# Altium PCB remote.PcbDoc (part 2 of 2)
Units mm, origin at the board's own origin, x right, y up, seen from the top; angles counter-clockwise.
Board outline 60.1 x 131.84 mm, 4 copper layers (Top Layer, Int1 (GND), Int2 (PWR), Bottom Layer), stack 1.569 mm thick; 97 components, 91 nets, 326 pads, 125 vias.
Unrouted connection lines stored in the file: 43.
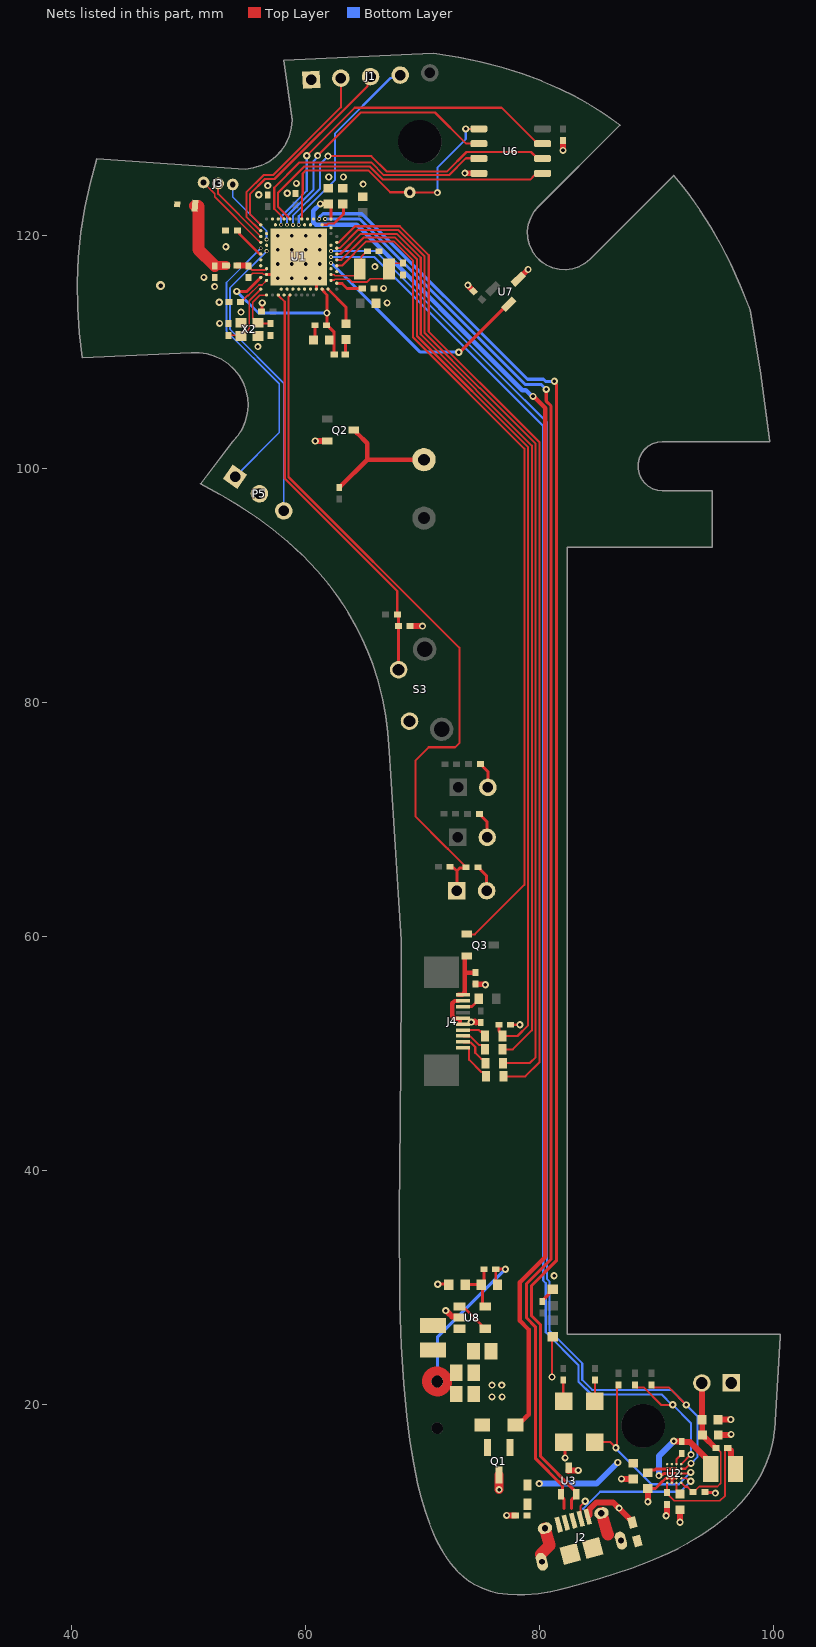
[diagram p4: the nets of this part, all layers, seen from the top]

## Via types
v1: diameter 0.61, hole 0.305, Top Layer to Bottom Layer, 110 vias
v2: diameter 0.33, hole 0.203, Top Layer to Bottom Layer, 13 vias
v3: diameter 0.61, hole 0.305, Top Layer to Bottom Layer, tented both sides, 1 vias
v4: diameter 0.762, hole 0.381, Top Layer to Bottom Layer, 1 vias

## Nets (pads, with @x,y where several pads share a name; then routed paths per layer and width w, separated by ;. In a path a pad name is that pad's centre, name@x,y a point inside that pad or via, vN(x,y) a via of type N, cw(c..) or ccw(c..) an arc to the next point about the centre after c; other vN are vias at no path point) (continued)
A16: C30.2 P6.1 R11.1 U1.A16 | length 63.1
  Top Layer w0.178: U1.A16@58.676,114.868 58.676,114.848 58.547,114.719 58.547,99.314 73.152,84.709 73.152,76.556 72.796,76.2 70.536,76.2 69.418,75.082 69.418,70.264 72.016,67.667 72.016,67.657 72.153,67.52 72.163,67.52 73.533,66.149 73.533,66.099 73.694,65.938 C30.2@73.744,65.938
  Top Layer w0.254: U1.A16@58.676,114.868 U1.A16@58.676,114.874 ; R11.1@72.357,65.989 72.48,65.866 72.708,65.866 72.949,65.626 ; P6.1@72.949,63.932 72.949,65.626 ; C30.2@73.744,65.938 73.695,65.889 73.212,65.889 72.949,65.626
A20: C32.2 R12.1 S3.1 U1.A20 | length 36.3
  Top Layer w0.178: U1.A20@57.676,114.874 57.676,114.848 57.724,114.799 57.724,114.792 58.224,114.293 58.224,99.18 67.846,89.559 67.846,87.569 R12.1@67.861,87.554
  Top Layer w0.254: C32.2@67.953,86.563 R12.1@67.953,87.494 ; S3.1@67.955,82.837 C32.2@67.955,86.561
  Top Layer w0.381: R12.1@67.861,87.554 67.893,87.554 R12.1@67.953,87.494 ; C32.2@67.953,86.563 C32.2@67.955,86.561 ; S3.1@67.955,82.837 S3.1@67.957,82.835
AC9: U1.AC9
AC11: U1.AC11
AC13: J1.4 U1.AC13 | length 16.7
  Bottom Layer w0.178: v2(59.426,120.874) 59.426,121.621 62.53,124.725 62.53,128.697 67.264,133.431 67.848,133.431 J1.4@68.097,133.68
AC15: U1.AC15 U6.6 | length 26.9
  Top Layer w0.178: v1(61.925,126.751) 65.628,126.751 66.929,125.451 72.111,125.451 73.762,127.102 79.287,127.102 79.846,126.543 U6.6@80.271,126.543
  Bottom Layer w0.178: v2(58.926,120.874) 58.926,121.658 61.239,123.972 61.239,126.065 v1(61.925,126.751)
AC17: U1.AC17 U6.2 | length 23.4
  Top Layer w0.178: v1(61.036,126.797) 64.719,130.48 71.069,130.48 73.736,127.813 74.396,127.813 U6.2@74.821,127.813
  Bottom Layer w0.178: v2(58.419,120.881) 58.419,121.626 60.681,123.888 60.681,126.324 61.036,126.68 v1(61.036,126.797)
AC19: U1.AC19 U6.7 | length 29.9
  Top Layer w0.178: v1(60.109,126.784) 64.211,130.886 76.773,130.886 79.846,127.813 U6.7@80.271,127.813
  Bottom Layer w0.178: v2(57.919,120.881) 57.919,121.59 60.109,123.78 v1(60.109,126.784)
AC21: U1.AC21
AD8: U1.AD8
AD10: U1.AD10
AD12: TP2.1 U1.AD12 U6.1 | length 23.9
  Top Layer w0.178: U1.AD12@59.676,121.374 59.694,121.392 59.694,123.461 59.766,123.533 59.766,125.265 60.035,125.534 65.376,125.534 67.25,123.66 68.897,123.66 TP2.1@68.91,123.647 71.247,123.647 v1(71.272,123.622) ; v1(73.698,129.07) 73.704,129.076 74.815,129.076 U6.1@74.821,129.083
  Bottom Layer w0.178: v1(71.272,123.622) 71.272,125.768 73.701,128.197 73.701,129.067 v1(73.698,129.07)
AD16: U1.AD16 U6.5 | length 26.9
  Top Layer w0.178: 58.547,121.527 58.676,121.398 U1.AD16@58.676,121.374 ; 58.547,121.528 58.33,121.745 57.651,122.424 57.651,123.606 59.902,125.857 65.509,125.857 66.628,124.739 79.222,124.739 79.583,125.099 80.098,125.099 U6.5@80.271,125.273
AD18: U1.AD18 U6.3 | length 22.5
  Top Layer w0.178: U1.AD18@58.176,121.374 58.176,121.399 57.328,122.247 57.328,124.054 59.487,126.213 65.61,126.213 66.695,125.128 72.27,125.128 73.711,126.568 74.796,126.568 U6.3@74.821,126.543
AD20: U1.AD20
AD22: U1.AD22
B9: U1.B9
B11: U1.B11
B13: U1.B13
B15: U1.B15
B17: U1.B17
B19: U1.B19
CHARGE_STAT: D2.2 R3.1 U2.C4 | length 16.5
  Top Layer w0.178: D2.2@84.734,16.792 86.06,16.792 v1(86.545,16.307) 86.628,16.389 86.628,21.536 R3.1@86.766,21.674 ; U2.C4@92.126,14.103 92.727,14.103 92.822,14.199 v1(92.939,14.199)
  Bottom Layer w0.178: v1(86.545,16.307) 86.545,16.223 89.585,13.183 91.916,13.183 92.932,14.199 v1(92.939,14.199)
G1: U1.G1
GND: C1.2 C2.2 C3.2 C4.2 C5.2 C6.2 C7.2 C8.2 C9.1 C10.2 C11.2 C12.2 C13.1 C14.2 C15.2 C16.2 C17.2 C18.1 C19.2 C20.2 C21.2 C22.2 C24.2 C25.2 C27.1 C28.1 C29.1 C30.1 C31.1 C32.1 C33.1 C34.1 C35.1 C36.2 C37.2 C38.2 D3.2 E1.1 FB2.2 J1.1 J2.5 J4.2 J4.5 J4.6 NT1.2 P1.1 P3.2 P5.2 P6.2 P8.2 Q2.2 R5.1 R8.1 R14.1 R20.1 S3.2 U1.74 U1.B7 U1.F23 U2.D1 U2.D2 U2.D3 U2.E2 U3.3 U4.2 U6.4 U7.3 U8.2 X2.2 X2.4 | length 52.8
  Top Layer w0.145: C3.2@55.115,116.367 55.115,116.417 55.293,116.594 55.343,116.594 55.478,116.729 56.172,116.729 ; 56.18,116.729 56.323,116.729 56.403,116.649 56.651,116.649 U1.F23@56.676,116.624
  Top Layer w0.25: X2.4@54.66,112.682 X2.4@54.666,112.689 ; X2.2@56.103,111.526 X2.2@56.11,111.532 ; U1.F23@56.676,116.624 57.926,116.624 U1.74@59.426,118.124 ; v1(58.826,117.524) U1.74@59.426,118.124 ; C6.2@60.68,111.029 60.812,111.161 C5.2@60.812,112.287 ; U1.B7@60.926,115.374 60.926,116.624 v1(60.026,117.524) U1.74@59.426,118.124 ; C20.2@88.017,13.632 C20.2@88.042,13.632 ; C21.2@89.262,12.819 89.918,12.819 90.405,13.306 90.773,13.673 90.896,13.673 U2.D1@90.926,13.703 U2.D2@91.326,13.703 ; C27.1@90.909,11.466 C27.1@90.913,11.47 ; U2.E2@91.326,13.303 U2.D2@91.326,13.703 ; U2.D3@91.726,13.703 U2.D2@91.326,13.703 ; C28.1@94.153,12.525 C28.1@94.15,12.522 94.201,12.471 94.996,12.471 v1(95.047,12.421)
  Top Layer w0.254: C16.2@56.396,113.577 56.273,113.454 C16.2@56.232,113.454 56.265,113.487 56.265,114.17 v1(56.298,114.203) v1@56.396,114.105 ; v1(71.31,30.29) 72.211,30.29 R8.1@72.249,30.251 ; C30.1@74.744,65.938 74.794,65.938 74.917,65.815 74.917,65.765 75.489,65.194 P6.2@75.489,63.932 ; C29.1@74.871,70.485 74.921,70.485 75.044,70.362 75.044,70.312 75.54,69.817 P3.2@75.54,68.504 ; C34.1@74.947,74.778 74.997,74.778 75.12,74.655 75.12,74.605 75.59,74.135 P8.2@75.59,72.771 ; R20.1@77.538,52.476 77.541,52.474 78.325,52.474 v1(78.328,52.471) ; C19.2@80.239,28.821 80.239,28.871 80.805,29.437 80.805,29.581 81.032,29.808 R5.1@81.255,29.808 ; C19.2@80.366,28.796 C19.2@80.366,28.846 ; D3.2@82.067,16.792 82.194,16.665 v1(82.194,15.443)
  Top Layer w0.381: J4.2@73.073,54.505 72.743,54.505 72.547,54.308 72.547,53.212 72.77,52.989 73.063,52.989 73.211,52.841 73.211,52.748
  Top Layer w0.508: v1(60.833,102.387) 60.838,102.382 61.837,102.382 Q2.2@61.842,102.377 ; C32.1@68.953,86.563 v1(70.002,86.563) ; v1(71.996,28.029) 72.024,28.029 72.247,27.806 72.25,27.806 72.528,27.528 73.074,27.528 U8.2@73.17,27.432 ; v1(73.635,125.298) 73.647,125.285 74.808,125.285 U6.4@74.821,125.273 ; v1(73.881,115.722) 73.901,115.703 73.901,115.665 74.369,115.197 C33.1@74.369,115.191 ; 74.471,52.748 74.428,52.705 v1(74.168,52.705) 74.541,52.705 74.585,52.661 ; R14.1@74.524,55.939 75.31,55.939 75.352,55.897 v1(75.379,55.897) ; v1(77.191,10.516) U4.2@77.935,10.516 ; U7.3@78.187,116.236 78.2,116.236 79.019,117.056 v1(79.032,117.056) ; C31.1@82.017,128.075 82.019,128.073 82.019,127.235 v1(82.021,127.233) ; U3.3@82.474,14.308 82.474,14.323 82.495,14.344 83.305,14.344 v1(83.325,14.364) ; J2.5@84.148,10.407 84.288,10.547 84.288,11.041 84.877,11.631 86.296,11.631 86.782,11.144 v1(86.809,11.144) 87.95,10.004 FB2.2@87.95,9.915 ; v1(87.02,13.64) 87.024,13.636 88.013,13.636 C20.2@88.017,13.632 ; C21.2@89.262,12.819 89.272,12.809 89.272,11.693 v1(89.281,11.684) ; v1(90.83,10.49) 90.83,10.518 90.909,10.596 C27.1@90.909,11.466 ; v1(92.024,9.931) C22.2@92.024,11.009 ; C24.2@95.265,18.694 95.277,18.707 96.355,18.707 v1(96.368,18.72) ; C25.2@95.29,17.399 96.315,17.399 96.366,17.45 v1(96.393,17.45)
  other v1: 75.946,20.65 76.81,20.65 75.946,21.666 76.784,21.666 81.255,31.013 55.931,110.465 52.654,112.446 54.483,113.411 66.98,114.198 52.629,114.249 66.675,115.443 52.23,115.593 57.626,116.324 58.826,116.324 60.026,116.324 61.226,116.324 51.308,116.383 57.626,117.524 61.226,117.524 57.626,118.724 58.826,118.724 60.026,118.724 61.226,118.724 53.188,118.999 57.626,119.924 58.826,119.924 60.026,119.924 61.226,119.924 56.007,123.444 58.438,123.571 56.769,124.231 64.922,124.358 59.224,124.418 61.986,124.963 63.246,124.963
  other v3: 65.938,117.297
  other v4: 47.612,115.675
H2: U1.H2
J1: Q3.1 U1.J1 | length 72.2
  Top Layer w0.178: U1.J1@62.68,117.378 63.119,117.378 65.202,119.46 67.534,119.46 69.206,117.788 69.206,111.238 78.715,101.73 78.715,64.445 74.478,60.208 Q3.1@73.602,60.208
  Top Layer w0.254: U1.J1@62.676,117.374 U1.J1@62.68,117.378
J24: U1.J24
K2: U1.K2 U7.2 | length 20.1
  Top Layer w0.254: v1(73.101,109.982) 73.189,109.982 77.286,114.08 U7.2@77.374,114.08
  Bottom Layer w0.254: v2(62.176,117.624) 69.818,109.982 v1(73.101,109.982)
L1: R16.2 R20.2 U1.L1 | length 81.5
  Top Layer w0.178: U1.L1@62.68,117.878 63.055,117.878 64.96,119.783 67.671,119.783 69.529,117.925 69.529,111.372 79.037,101.864 79.037,52.419 78.13,51.511 R16.2@76.848,51.511
  Top Layer w0.254: U1.L1@62.676,117.874 U1.L1@62.68,117.878 ; R20.2@76.541,52.474 R20.2@76.538,52.476 76.538,51.921 76.846,51.614 76.846,51.514 R16.2@76.848,51.511
L24: U1.L24
LCD_LED+: J4.1 Q3.2 R14.2 | length 4.6
  Top Layer w0.381: J4.1@73.05,55.053 73.419,55.053 73.609,55.242 73.609,56.949 ; Q3.2@73.602,58.308 73.602,56.956 73.62,56.939 R14.2@74.524,56.939
M2: R1.1 U1.M2 U2.A4 | length 126
  Top Layer w0.178: R1.1@88.189,21.674 88.189,21.624 88.35,21.463 88.916,21.463 90.402,19.977 v1(91.402,19.977) ; U2.A4@92.126,14.903 92.132,14.903 92.951,15.723 v1(92.964,15.723)
  Bottom Layer w0.178: v2(62.176,118.124) 65.881,118.124 80.33,103.675 80.33,30.592 80.546,30.376 80.546,26.174 83.337,23.382 83.337,21.971 84.455,20.853 90.449,20.853 91.326,19.977 v1(91.402,19.977) 92.964,18.415 v1(92.964,15.723)
N1: R17.2 U1.N1 | length 81.9
  Top Layer w0.178: U1.N1@62.68,118.378 62.991,118.378 64.719,120.106 67.805,120.106 69.852,118.058 69.852,111.505 79.36,101.997 79.36,52.004 77.724,50.368 R17.2@76.848,50.368
  Top Layer w0.254: U1.N1@62.676,118.374 U1.N1@62.68,118.378
NetC1_1: C1.1 U1.D2 X1.2 | length 7
  Top Layer w0.145: U1.D2@62.176,116.124 62.201,116.149 62.449,116.149 62.529,116.229 62.667,116.229 ; 62.681,116.229 63.563,116.229 63.758,116.229 64.01,115.976 65.233,115.976 65.523,116.266 66.715,116.266 67.143,116.694 X1.2@67.143,117.094 ; X1.2@67.323,117.274 67.323,117.436 67.481,117.594 C1.1@68.326,117.594
NetC2_1: C2.1 U1.F2 X1.1 | length 4.7
  Top Layer w0.145: U1.F2@62.176,116.624 62.201,116.599 62.449,116.599 62.529,116.519 62.671,116.519 63.443,116.519 64.216,116.519 64.643,116.946 X1.1@64.643,117.094 64.77,117.221 64.77,118.144 65.244,118.618 C2.1@65.294,118.618
NetC3_1: C3.1 L1.1 U1.H23 | length 2.8
  Top Layer w0.145: C3.1@55.115,117.367 55.115,117.317 55.413,117.019 56.536,117.019 56.641,117.124 U1.H23@56.676,117.124
  Top Layer w0.508: L1.1@54.154,117.405 55.111,117.405 55.115,117.401 C3.1@55.115,117.367
NetC9_2: C9.2 U1.B24 X2.1 | length 5.9
  Top Layer w0.15: C9.2@53.409,111.427 54.405,111.427 X2.1@54.48,111.352 54.53,111.352 55.035,111.857 55.046,111.857 55.196,112.008 55.196,114.394 U1.B24@56.176,115.374
NetC13_2: C13.2 U1.A23 X2.3 | length 4.5
  Top Layer w0.15: U1.A23@56.676,114.874 56.652,114.85 56.1,114.85 55.499,114.249 55.499,112.94 55.53,112.909 55.53,112.852 55.88,112.502 X2.3@55.93,112.502 56.005,112.427 C13.2@57.001,112.427
NetC21_1: C21.1 U2.B1 U2.B2 U2.B3 | length 2.6
  Top Layer w0.254: C21.1@89.262,14.169 89.51,14.417 89.887,14.417 89.974,14.503 90.452,14.503 90.453,14.502 90.925,14.502 U2.B1@90.926,14.503 U2.B2@91.326,14.503 U2.B3@91.726,14.503
NetC22_1: C22.1 U2.E3 | length 1.1
  Top Layer w0.15: U2.E3@91.726,13.303 91.726,12.657 C22.1@92.024,12.359
NetC23_1: C23.1 L4.1 U2.C1 U2.C2 U2.C3 | length 9.6
  Top Layer w0.254: v1(90.213,13.927) 90.281,13.995 90.532,13.995 90.641,14.103 U2.C1@90.926,14.103 U2.C2@91.326,14.103 U2.C3@91.726,14.103
  Top Layer w0.508: v1(91.491,16.866) 91.508,16.849 92.173,16.849 92.177,16.845 C23.1@92.177,16.832 92.177,16.79 92.181,16.786 92.896,16.786 94.261,15.421 94.261,14.869 L4.1@94.652,14.478
  Bottom Layer w0.508: v1(90.213,13.927) 90.213,15.588 v1(91.491,16.866)
NetC23_2: C23.2 U2.A3 | length 1.1
  Top Layer w0.178: U2.A3@91.73,14.908 U2.A3@91.726,14.903 91.726,15.331 92.177,15.782 C23.2@92.177,15.832
NetC26_2: C26.2 R7.1 R8.2 U8.5 | length 4.8
  Top Layer w0.254: R8.2@73.649,30.251 R7.1@75.017,30.251 ; C26.2@75.268,31.572 75.268,30.502 R7.1@75.017,30.251 ; U8.5@75.369,28.382 75.343,28.382 75.12,28.605 75.12,30.149 R7.1@75.017,30.251
NetC27_2: C27.2 L4.2 R6.2 U2.E1 | length 12.6
  Top Layer w0.15: C27.2@90.913,12.47 91.088,12.295 91.088,12.205 91.529,11.764 95.432,11.764 95.881,12.213 95.881,16.106 96.056,16.281 R6.2@96.106,16.281
  Top Layer w0.178: C27.2@90.913,12.47 90.913,13.285 90.926,13.297 U2.E1@90.926,13.303
  Top Layer w0.508: R6.2@96.106,16.281 96.148,16.281 96.371,16.058 96.371,14.869 L4.2@96.762,14.478
NetC36_1: C36.1 D1.2 Q1.2 U8.1 U8.4 | length 3.1
  Top Layer w0.254: U8.1@73.17,28.382 73.393,28.159 73.678,28.159 74.996,26.841 74.996,26.705 75.219,26.482 U8.4@75.369,26.482
NetD2_1: D2.1 R21.1 | length 1.8
  Top Layer w0.178: D2.1@84.734,20.292 84.76,20.317 R21.1@84.76,22.081
NetD3_1: D3.1 R22.1 | length 1.8
  Top Layer w0.178: R22.1@82.042,22.081 82.042,20.317 D3.1@82.067,20.292
NetFB1_2: FB1.2 J2.1 U4.1
NetJ1_2: J1.2 U1.AA24 | length 17.4
  Top Layer w0.178: U1.AA24@56.176,120.374 56.15,120.374 54.948,121.576 54.948,123.655 56.41,125.117 57.223,125.117 63.024,130.918 J1.2@63.024,133.414
NetJ1_3: J1.3 U1.AC24 | length 17.8
  Top Layer w0.178: U1.AC24@56.176,120.874 55.27,121.779 55.27,123.521 56.54,124.79 57.353,124.79 65.308,132.745 65.308,133.294 J1.3@65.561,133.547
NetJ4_3: J4.3 R15.1 | length 1.7
  Top Layer w0.254: J4.3@73.482,54.019 73.492,54.029 74.233,54.029 74.815,54.612 R15.1@74.815,54.712
NetJ4_7: J4.7 R16.1 | length 2.1
  Top Layer w0.178: J4.7@73.482,52.019 74.84,52.019 74.987,51.872 75.087,51.872 75.348,51.611 R16.1@75.348,51.511
NetJ4_8: J4.8 R17.1 | length 2.4
  Top Layer w0.178: J4.8@73.482,51.519 73.543,51.458 74.124,51.458 74.853,50.729 75.087,50.729 75.348,50.468 R17.1@75.348,50.368
NetJ4_9: J4.9 R18.1 | length 3.3
  Top Layer w0.178: J4.9@73.482,51.019 73.543,50.958 74.124,50.958 74.513,50.569 74.513,50.073 75.025,49.561 75.138,49.561 R18.1@75.399,49.3
  Top Layer w0.254: J4.9@73.073,51.03 J4.9@73.482,51.03
NetJ4_10: J4.10 R19.1 | length 3.6
  Top Layer w0.178: J4.10@73.482,50.519 73.932,50.519 73.993,50.458 73.993,49.475 75.05,48.418 75.163,48.418 75.425,48.157 R19.1@75.425,48.057
NetL2_1: L2.1 L3.2 | length 1.4
  Top Layer w0.25: L3.2@63.403,109.772 63.403,111.009 L2.1@63.467,111.073 ; L2.1@63.583,111.189 L2.1@63.647,111.252
NetL5_1: L5.1 U8.3
NetLS1_2: LS1.2 Q2.3 R10.1 | length 11.3
  Top Layer w0.381: R10.1@62.89,98.417 62.89,98.467 62.95,98.526 63,98.526 65.271,100.798 ; Q2.3@64.142,103.327 64.292,103.327 64.402,103.218 64.402,103.068 65.271,102.198 65.271,100.798 ; LS1.2@70.129,100.798 65.271,100.798
nRF_DCC: L2.2 U1.B3 | length 3.6
  Top Layer w0.25: U1.B3@61.926,115.374 63.467,113.833 L2.2@63.467,112.423
nRF_DCCH: U1.AB2
nRF_DEC1: C12.1 U1.C1 | length 2.4
  Top Layer w0.25: U1.C1@62.676,115.874 62.681,115.869 63.099,115.869 63.195,115.774 63.539,115.43 C12.1@64.853,115.43
nRF_DEC2: U1.A18
nRF_DEC3: C10.1 U1.D23 | length 3
  Top Layer w0.15: C10.1@54.448,114.262 54.498,114.262 55.074,114.838 55.128,114.838 56.021,115.731 56.283,115.731 U1.D23@56.676,116.124
nRF_DEC4_6: C5.1 C6.1 L3.1 U1.B5 U1.E24 | length 17.1
  Top Layer w0.25: v1(54.121,115.183) 54.985,115.183 U1.E24@56.176,116.374 ; U1.B5@61.426,115.374 61.426,115.367 61.518,115.275 61.518,115.205 61.849,114.874 61.849,113.335 61.849,113.055 61.83,113.037 61.83,112.305 C5.1@61.812,112.287 61.862,112.287 62.453,111.695 L3.1@62.453,109.772
  Bottom Layer w0.25: v1(54.121,115.183) 55.97,113.335 v1(61.824,113.335)
nRF_DEC5: C11.1 U1.N24 | length 3
  Top Layer w0.25: C11.1@54.17,120.396 54.22,120.396 54.345,120.271 54.345,120.089 56.056,118.379 U1.N24@56.171,118.379 ; U1.N24@56.169,118.374 U1.N24@56.176,118.374 ; U1.N24@56.171,118.379 U1.N24@56.176,118.374 ; U1.N24@56.171,118.379 U1.N24@56.176,118.374
nRF_DECUSB: C8.1 U1.AC5 | length 3.1
  Top Layer w0.184: U1.AC5@61.451,120.874 U1.AC5@61.426,120.874 61.428,120.876 61.839,120.876 61.963,120.999 62.452,120.999 62.611,121.158
  Top Layer w0.25: 62.611,121.158 63.246,121.793 63.246,122.609 C8.1@63.198,122.657
nRF_VBUS: C7.1 C20.1 D1.1 FB1.1 Q1.1 U1.AD2 U2.A1 U2.A2 | length 126.5
  Top Layer w0.25: C7.1@61.94,122.657 62.176,122.422 U1.AD2@62.176,121.374
  Top Layer w0.381: v1(61.274,122.659) C7.1@61.94,122.658 ; D1.1@77.955,18.237 78.08,18.237 78.44,18.597 78.522,18.597 78.923,18.998 79.07,19.145 79.07,26.416 78.334,27.153 78.334,30.455 80.518,32.639 80.518,105.197 79.513,106.202 v1(79.451,106.202)
  Bottom Layer w0.381: v1(61.274,122.659) 61.253,122.639 61.232,122.639 60.67,122.076 60.67,121.091 60.893,120.868 64.399,120.868 78.527,106.74 78.851,106.74 79.389,106.202 v1(79.451,106.202)
  Bottom Layer w0.508: v1(79.985,13.233) 84.885,13.233 v1(86.695,15.043)
P2: R2.1 U1.P2 U2.B4 | length 127.8
  Top Layer w0.178: R2.1@89.586,21.674 89.586,21.624 89.747,21.463 91.059,21.463 v1(92.558,19.964) ; U2.B4@92.126,14.503 92.13,14.508 92.486,14.508 92.939,14.961 v1(92.964,14.961)
  Bottom Layer w0.178: v2(62.176,118.624) 66.009,118.624 76.754,107.879 80.658,103.975 80.658,30.728 80.874,30.512 80.874,26.31 82.026,25.158 82.03,25.158 83.665,23.523 83.665,22.107 84.512,21.26 91.262,21.26 v1(92.558,19.964) 93.508,19.014 93.508,15.497 92.971,14.961 v1(92.964,14.961)
P23: P5.3 U1.P23 | length 25.4
  Bottom Layer w0.15: v2(56.676,118.624) 53.543,115.491 53.543,111.938 58.141,107.34 P5.3@58.141,96.418
PCB_ANT: C4.1 L1.2 NT1.1 | length 7
  Top Layer w0.762: C4.1@52.242,117.367 52.28,117.405 L1.2@53.204,117.405
  Top Layer w1.016: NT1.1@50.538,122.504 50.764,122.504 cw(c50.764,122.418) 50.825,122.479 50.851,122.453 50.851,118.757 C4.1@52.242,117.367
R1: R18.2 U1.R1 | length 84.5
  Top Layer w0.178: U1.R1@62.68,118.878 62.926,118.878 64.477,120.429 67.938,120.429 70.175,118.192 70.175,111.639 74.905,106.909 74.927,106.909 79.683,102.154 79.683,49.711 79.172,49.2 R18.2@76.899,49.2
  Top Layer w0.254: U1.R1@62.676,118.874 U1.R1@62.68,118.878
R24: P5.1 U1.R24 | length 24.2
  Bottom Layer w0.15: P5.1@53.979,99.332 57.76,103.112 57.76,107.269 53.243,111.785 53.243,115.941 v2(56.176,118.874)
REG_OUT: C26.1 C37.1 C38.1 L5.2 P2.2 R7.2 | length 17.4
  Top Layer w0.254: R7.2@76.417,30.251 76.268,30.401 C26.1@76.268,31.572 v1(77.089,31.572)
  Top Layer w1.5: P2.2@71.722,22.002 ccw(c71.222,22.002) P2.2@71.722,22.002
  Bottom Layer w0.254: P2.2@71.272,21.964 71.272,25.756 v1(77.089,31.572)
T2: U1.T2
T23: U1.T23
U1: R19.2 U1.U1 | length 86.1
  Top Layer w0.178: U1.U1@62.68,119.378 62.862,119.378 64.236,120.752 68.072,120.752 70.536,118.288 70.536,111.735 74.895,107.375 74.918,107.375 80.01,102.283 80.01,49.261 78.806,48.057 R19.2@76.925,48.057 R19.2@76.981,48
  Top Layer w0.254: U1.U1@62.676,119.374 U1.U1@62.68,119.378
U24: J3.1 U1.U24 | length 7.2
  Top Layer w0.15: J3.1@51.28,124.496 52.232,123.544 52.232,123.273 56.016,119.489 56.027,119.489 56.142,119.374 U1.U24@56.176,119.374
USB_EARTH: FB2.1 J2.6 J2.7 J2.8 J2.9 J2.10 J2.11 | length 4.5
  Top Layer w1.016: J2.8@80.119,7.194 80.879,7.954 J2.6@80.477,9.424 ; J2.7@85.307,10.718 85.857,8.894
USB_N: J2.2 U1.AD4 U3.1 | length 123
  Top Layer w0.266: v1(80.582,106.797) 80.582,105.795 80.986,105.391 80.986,32.422 78.892,30.328 78.892,27.407 79.68,26.619 79.68,15.367 81.966,13.081 81.966,12.454 U3.1@81.849,12.337 ; U3.1@81.824,12.187 82.118,11.893 82.118,11.1
  Bottom Layer w0.266: v2(61.676,121.374) 61.679,121.371 64.633,121.371 78.79,107.214 80.165,107.214 v1(80.582,106.797)
USB_OTG: J2.4 U2.D4 | length 12.8
  Top Layer w0.15: U2.D4@92.126,13.703 92.547,13.703 92.814,13.437 v1(92.939,13.437)
  Top Layer w0.178: J2.4@83.52,10.239 83.501,10.257 83.501,11.315 v1(83.922,11.735)
  Bottom Layer w0.178: 83.747,11.068 83.747,11.103 85.189,12.545 92.047,12.545 v1(92.939,13.437)
USB_P: J2.3 U1.AD6 U3.2 | length 125
  Top Layer w0.266: v1(81.28,107.493) 81.28,107.4 81.452,107.228 81.452,32.288 79.324,30.16 79.324,27.584 80.09,26.818 80.09,15.566 U3.2@82.983,12.674 ; 82.753,11.1 82.753,11.864 82.909,12.02 83.007,12.02 83.149,12.162 U3.2@83.149,12.337
  Bottom Layer w0.266: v2(61.176,121.374) 61.188,121.386 61.188,121.52 61.49,121.822 64.82,121.822 78.977,107.665 80.352,107.665 80.524,107.493 v1(81.28,107.493)
V23: J3.3 U1.V23 | length 5.9
  Bottom Layer w0.15: J3.3@53.774,124.322 53.774,123.252 56.676,120.35 v2(56.676,119.624)
VBAT: C24.1 C25.1 C28.2 P1.2 Q1.3 R4.2 R6.1 U2.E4 | length 18.2
  Top Layer w0.15: v1(81.077,22.352) 81.077,25.691 R4.2@81.28,25.894 ; C28.2@93.079,12.543 93.22,12.543 93.67,12.992 95.233,12.992 95.517,13.277 95.517,15.92 95.156,16.281 R6.1@95.106,16.281
  Top Layer w0.178: U2.E4@92.126,13.303 92.461,12.968 92.645,12.968 92.715,12.898 92.724,12.898 C28.2@93.079,12.543
  Top Layer w0.508: P1.2@93.893,21.844 93.904,21.833 93.904,18.705 C24.1@93.915,18.694 93.927,18.682 93.927,17.412 C25.1@93.94,17.399 93.94,17.374 94.061,17.253 94.092,17.253 95.064,16.281 R6.1@95.106,16.281
  Top Layer w0.762: Q1.3@76.53,13.989 76.556,13.963 v1(76.556,12.725)
W24: J3.2 U1.W24 | length 6
  Top Layer w0.15: J3.2@52.527,124.409 52.527,123.517 56.17,119.874 U1.W24@56.176,119.874
Y23: U1.Y23
pads on no net: J4.MP1 J4.MP2 S3.3 S3.4

## Polygon pours and split planes (outlines as drawn)
GND on Top Layer "NONET_L01_P001" (solid, remove dead copper, shelved, pour order 1): 183 vertices, not listed, extent 40.487,3.719 100.586,135.56
GND on Bottom Layer "NONET_L04_P002" (solid, remove dead copper, shelved, pour order 2): 183 vertices, not listed, extent 40.487,3.719 100.586,135.56
GND on Int1 (GND) "NONET_L02_P003" (solid, remove dead copper, shelved, pour order 3): 183 vertices, not listed, extent 40.487,3.719 100.586,135.56
3.3V on Int2 (PWR) "NONET_L03_P004" (solid, remove dead copper, shelved, pour order 4): 183 vertices, not listed, extent 40.487,3.719 100.586,135.56

## Keep-outs
Keep-Out Layer:
  lines w1.2: 40.296,112.972 40.329,112.462 40.585,118.08 40.8,120.216 41.132,122.338 41.58,124.438 42.143,126.51 54.862,125.645 55.565,125.739 56.242,125.951 56.874,126.273 57.443,126.697 57.932,127.211 58.327,127.799 58.619,128.446 58.797,129.133 58.856,129.84 58.148,134.935 70.933,135.56 71.213,135.521 73.075,135.219 74.932,134.833 76.786,134.351 78.555,133.791 80.196,133.175 81.812,132.466 82.948,131.9 84.054,131.288 85.503,130.39 86.892,129.409 79.899,122.415 79.528,121.968 79.245,121.46 79.06,120.909 78.98,120.334 79.007,119.753 79.14,119.187 79.375,118.655 79.703,118.176 80.114,117.765 80.594,117.436 81.126,117.202 81.691,117.069 82.272,117.042 82.848,117.122 83.399,117.307 83.907,117.59 84.354,117.961 91.486,125.093 92.137,124.308 92.759,123.506 93.725,122.147 94.647,120.701 95.525,119.165 96.358,117.531 97.184,115.7 97.923,113.844 98.019,113.589 98.909,108.152 99.638,102.692 99.68,102.339 90.526,102.339 90.089,102.293 89.672,102.157 89.292,101.938 88.966,101.644 88.707,101.289 88.529,100.888 88.438,100.459 88.438,100.02 88.529,99.59 88.707,99.189 88.966,98.834 89.292,98.54 89.672,98.321 90.089,98.185 90.526,98.139 94.776,98.139 94.776,93.319 82.373,93.319 82.373,25.997 100.586,25.997 100.586,25.818 100.109,17.839 100.095,17.731 100.019,17.212 99.891,16.555 99.68,15.758 99.364,14.878 98.913,13.927 98.424,13.108 97.931,12.419 97.259,11.623 96.64,10.989 95.97,10.382 95.025,9.632 93.885,8.852 92.642,8.114 91.836,7.685 91.029,7.288 89.434,6.585 87.896,5.992 85.116,5.084 83.151,4.539 82.371,4.33 81.686,4.158 80.951,3.998 79.913,3.832 78.759,3.735 78.126,3.719 77.286,3.758 76.431,3.882 75.805,4.035 75.129,4.276 74.449,4.61 73.99,4.898 73.571,5.215 72.968,5.772 72.417,6.411 72.018,6.97 71.608,7.64 71.195,8.428 70.882,9.119 70.606,9.808 70.229,10.892 69.894,12.029 69.609,13.166 69.24,14.955 68.916,16.956 68.654,19.035 68.398,21.799 68.2,25.015 68.073,28.611 68.009,36.454 68.085,44.25 68.15,49.37 68.193,56.001 68.193,56.92 68.178,59.716 67.938,63.663 67.677,67.781 67.294,73.865 67.167,75.81 67.031,77.462 66.858,78.875 66.605,80.258 66.405,81.118 66.176,81.967 65.747,83.306 65.333,84.391 64.868,85.453 64.35,86.491 63.628,87.759 62.831,88.978 61.963,90.148 61.019,91.274 59.689,92.671 58.465,93.8 57.233,94.818 55.847,95.845 54.322,96.856 52.642,97.851 51.019,98.72 53.783,102.333 54.227,102.851 54.587,103.43 54.854,104.057 55.023,104.717 55.089,105.396 55.051,106.076 54.91,106.743 54.669,107.381 54.334,107.974 53.912,108.51 53.414,108.975 52.851,109.358 52.235,109.652 51.583,109.848 50.908,109.942 50.226,109.933 40.521,109.495 40.365,111.9 40.296,112.972

## Other copper
Top Layer:
  rectangle net USB_N: 81.915,10.338 82.321,11.481
  rectangle net USB_P: 82.55,10.509 82.956,11.481
  region net NetC36_1: 78.588,19.137 78.588,19.914 74.473,19.914 74.473,19.137
  rectangle net NetC36_1: 74.422,15.596 75.895,19.914
  rectangle net nRF_VBUS: 78.638,12.624 79.375,17.12
  rectangle net nRF_VBUS: 77.14,15.596 79.375,17.12
  rectangle net nRF_VBUS: 77.14,15.596 78.638,18.796
  rectangle net nRF_VBUS: 87.738,14.789 91.446,15.373
  region net USB_EARTH: 80.096,5.2 87.768,7.256 87.134,9.621 79.463,7.566
  rectangle net nRF_VBUS: 78.638,12.573 80.721,13.919
  rectangle net GND: 73.787,20.193 74.981,25.248
  region net USB_EARTH: 87.111,7.484 88.849,7.95 88.604,8.867 86.865,8.401
  rectangle net GND: 74.27,20.193 77.216,22.047
  rectangle net nRF_VBUS: 86.29,14.484 88.475,15.551
  rectangle net REG_OUT: 69.774,20.193 73.406,25.273
  rectangle net GND: 72.441,52.4 75.331,53.213
  rectangle net 3.3V: 70.028,15.748 73.66,19.736
  rectangle net NetL5_1: 69.926,26.137 73.609,26.822
  rectangle net NetC36_1: 75.311,23.851 75.87,26.822
  rectangle net NetC36_1: 77.724,19.202 78.588,25.324
  rectangle net NetC36_1: 75.59,23.851 78.588,25.324
  rectangle net NetFB1_2: 78.689,10.211 81.592,10.846
  rectangle net NetFB1_2: 78.588,10.216 79.375,11.938
  region net NetFB1_2: 81.61,9.017 82.05,9.135 81.592,10.846 81.152,10.728
  region net NetFB1_2: 79.535,10.366 79.864,10.647 79.362,11.233 79.033,10.952
  pour cut-out: 40.902,109.512 40.585,118.08 42.143,126.51 49.799,125.989 48.339,109.848
  pour cut-out: 56.642,117.36 56.642,118.86 59.142,118.86 59.142,117.36
  pour cut-out: 56.153,119.259 55.093,120.32 56.86,122.088 57.921,121.027
  pour cut-out: 62.604,121.615 62.604,123.015 64.802,123.015 64.802,121.615
  pour cut-out: 55.826,118.541 53.387,118.541 53.387,116.691 54.092,116.691 54.092,115.606 55.826,115.606
  region net NetL5_1: 72.72,26.772 72.085,27.407 70.637,27.407 70.637,26.924 70.485,26.772
  region net NetC36_1: 75.851,26.833 78.588,25.324 75.786,25.119
Int1 (GND):
  pour cut-out: 40.902,109.512 40.585,118.08 42.143,126.51 49.799,125.989 48.339,109.848
  pour cut-out: 54.854,118.567 52.794,118.567 52.669,123.506 48.641,123.506 48.641,115.646 54.854,115.646
Int2 (PWR):
  rectangle net VBAT: 75.946,12.065 79.172,16.637
  rectangle net VBAT: 78.029,20.65 95.047,22.936
  rectangle net VBAT: 78.029,14.072 80.34,22.936
  pour cut-out: 40.902,109.512 40.585,118.08 42.143,126.51 49.799,125.989 48.339,109.848
  pour cut-out: 54.854,118.567 52.794,118.567 52.669,123.506 48.641,123.506 48.641,115.646 54.854,115.646
Bottom Layer:
  pour cut-out: 40.902,109.512 40.585,118.08 42.143,126.51 49.767,125.993 49.404,121.844 47.886,121.977 46.828,109.885

## Silkscreen, mask and mechanical layers (free items; w line width, h text height)
Top Overlay:
  text "ES Remote / v0.0.1 / Cameron Kluza" at 83.947,103.683 h1.02
Top Solder:
  region: 41.857,112.032 41.96,113.217 41.199,113.284 41.095,112.098

## Text inside footprints (layer, text, board x,y; h text height)
J1: Top Overlay "GND" at 59.545,131.375 h0.81 r3; Top Overlay "CLK" at 62.081,131.508 h0.81 r3; Top Overlay "IO" at 65.024,131.662 h0.81 r3; Top Overlay "RST" at 67.154,131.774 h0.81 r3; Top Overlay "3v3" at 69.691,131.907 h0.81 r3
J2: Mechanical 6 "PCB EDGE" at 77.037,4.102 h0.81 r15
P5: Top Overlay "Rx" at 54.094,100.647 h0.89 r325; Top Overlay "Tx" at 58.184,97.721 h0.89 r325